# EAGLE board Gamepad_PCB (EAGLE 9.7.0)
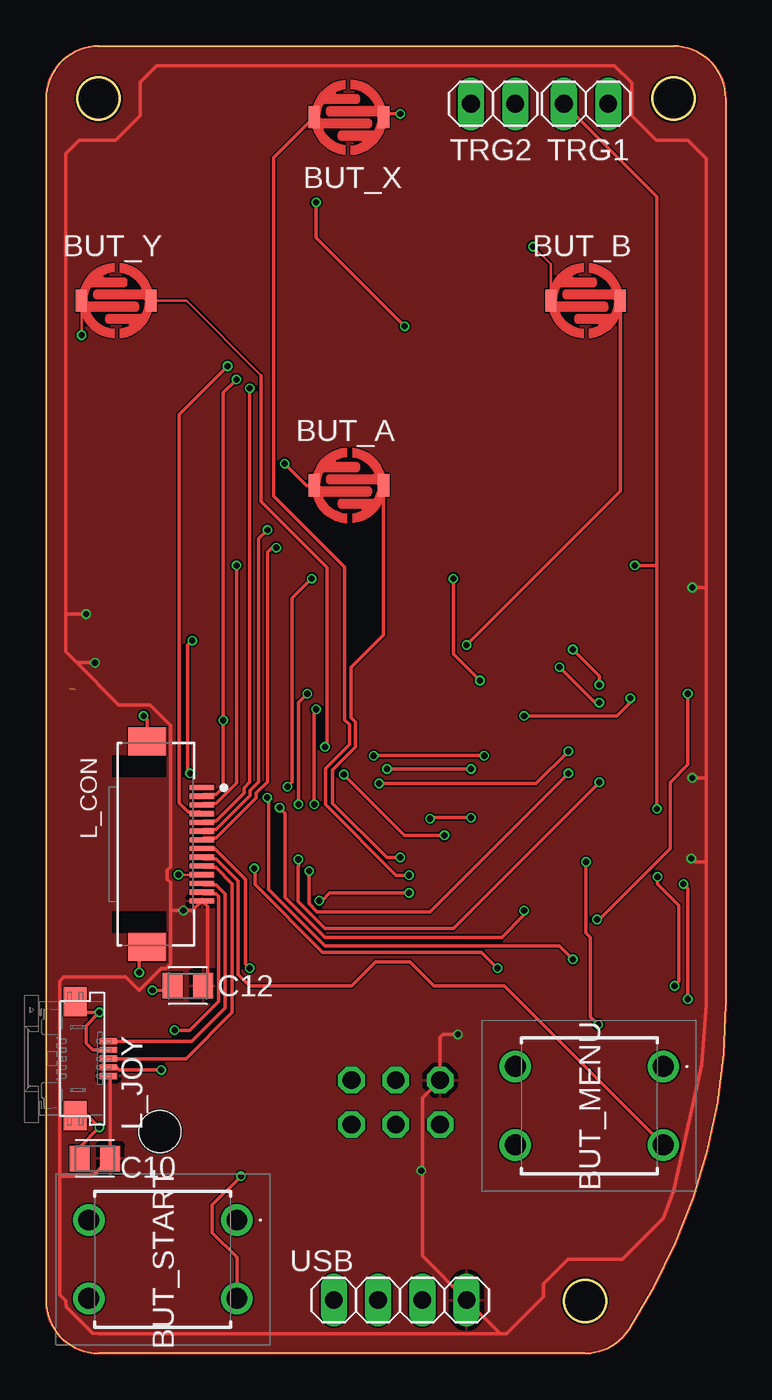
[diagram p0: board, top side]
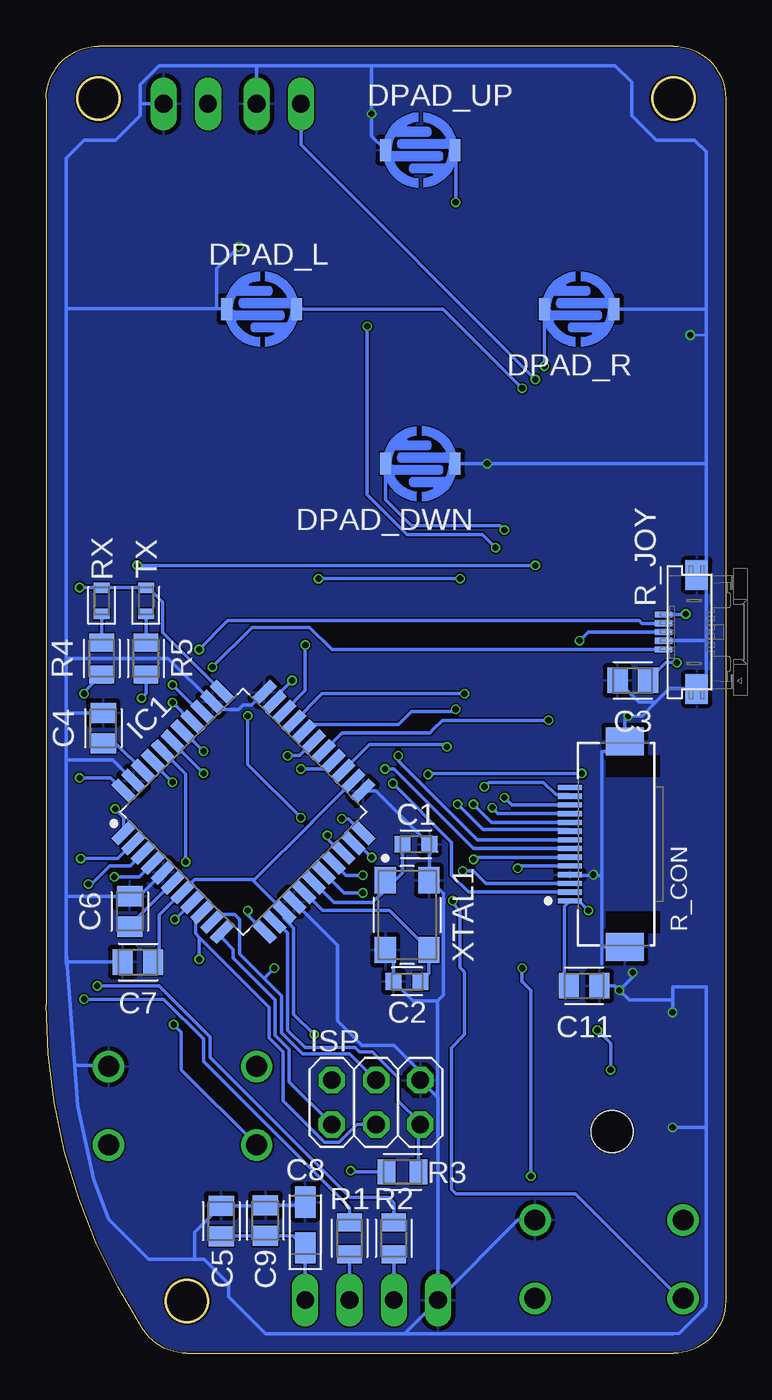
[diagram p1: board, bottom side, seen from below]

Size 39 x 75 mm. Coordinates in mm from the lower left corner, seen from the top.
Outline: 3,75 arc90 0,72 0,3 arc90 3,0 30.92,0 arc57 33.43,1.35 arc33 39,20 39,72 arc90 36,75 3,75
Outline: circle at 3,72 radius 1.2
Outline: circle at 30.92,3 radius 1.2
Outline: circle at 36,72 radius 1.2
Copper layers (1*16): Top / Bottom
Stack-up Default Layer Stack: Top User Defined 0.035mm / Dielectric-1 Core:089 1.5mm / Bottom User Defined 0.035mm
Design rules "jlcpcb-2-layer *": minimum track width 3.5mil, minimum drill 0.2mm, track to track 3.5mil, track to pad 5mil, pad to pad 5mil, via to via 5mil, smd to smd 0mil, copper to edge 0.1mm, drill to drill 5mil, minimum pad ring 4mil, minimum via ring 4mil, stop-mask expansion 3mil, vias tented up to drill 100mil, thermal gap 10mil
Holes 2.4 mm at 6.52,12.72

## Footprints (pad centres in the part's own frame; a part is rotated, then mirrored left to right if it is on the bottom)
MEMBRANEBUTTON = smd 0.635 x 1.27: P$1 2,0; P$2 -2,0
TL9000F120QG = drill 1.2 pad 1.8: 1 0,0; 2 0,8.5; 3 -4.5,0; 4 -4.5,8.5
CAPC1608X85 = smd 0.921 x 0.97: 1 -0.775,0; 2 0.775,0
CAPC2012X110 = smd 1.165 x 1.465: 1 -0.875,0; 2 0.875,0
CAPMP3216X180N = smd 1.796 x 1.189: 1 -1.31,0; 2 1.31,0
QFP80P1200X1200X120-44 = smd 1.5 x 0.55: 1 -5.7,4; 2 -5.7,3.2; 3 -5.7,2.4; 4 -5.7,1.6; 5 -5.7,0.8; 6 -5.7,0; 7 -5.7,-0.8; 8 -5.7,-1.6; 9 -5.7,-2.4; 10 -5.7,-3.2; 11 -5.7,-4; 23 5.7,-4; 24 5.7,-3.2; 25 5.7,-2.4; 26 5.7,-1.6; 27 5.7,-0.8; 28 5.7,0; 29 5.7,0.8; 30 5.7,1.6; 31 5.7,2.4; 32 5.7,3.2; 33 5.7,4 | smd 0.55 x 1.5: 12 -4,-5.7; 13 -3.2,-5.7; 14 -2.4,-5.7; 15 -1.6,-5.7; 16 -0.8,-5.7; 17 0,-5.7; 18 0.8,-5.7; 19 1.6,-5.7; 20 2.4,-5.7; 21 3.2,-5.7; 22 4,-5.7; 34 4,5.7; 35 3.2,5.7; 36 2.4,5.7; 37 1.6,5.7; 38 0.8,5.7; 39 0,5.7; 40 -0.8,5.7; 41 -1.6,5.7; 42 -2.4,5.7; 43 -3.2,5.7; 44 -4,5.7
2X03 = drill 1.016 octagon: 1 -2.54,-1.27; 2 -2.54,1.27; 3 0,-1.27; 4 0,1.27; 5 2.54,-1.27; 6 2.54,1.27
MOLEX_52892-1433_0 = smd 0.3 x 1.4: 1 -3.25,1.575; 2 -2.75,1.575; 3 -2.25,1.575; 4 -1.75,1.575; 5 -1.25,1.575; 6 -0.75,1.575; 7 -0.25,1.575; 8 0.25,1.575; 9 0.75,1.575; 10 1.25,1.575; 11 1.75,1.575; 12 2.25,1.575; 13 2.75,1.575; 14 3.25,1.575 | smd 1.6 x 2.2: MP1 -5.9,-1.575; MP2 5.9,-1.575
0545500571 = smd 1.65 x 1.3: P$1 -2.275,-0.65; P$2 4.275,-0.65 | smd 0.3 x 1: P$3 0,1.25; P$4 0.5,1.25; P$5 1,1.25; P$6 1.5,1.25; P$7 2,1.25
RESC2012X65 = smd 1.031 x 1.42: 1 -0.919,0; 2 0.919,0
LEDC1608X55N_FLAT-G = smd 0.612 x 0.912: A 0.75,0; C -0.75,0
1X02 = drill 1.016 long: 1 -1.27,0; 2 1.27,0
1X04 = drill 1.016 long: 1 -3.81,0; 2 -1.27,0; 3 1.27,0; 4 3.81,0
OSCCC500X320X110 = smd 1.512 x 1.212: 1 -2,-1.25; 2 2,-1.25; 3 2,1.25; 4 -2,1.25

## Placement (x,y rotation side)
BUT_A  MEMBRANEBUTTON  [MEMBRANEBUTTON]  17.37,49.8 0 top
BUT_B  MEMBRANEBUTTON  [MEMBRANEBUTTON]  30.96,60.4 0 top
BUT_MENU  TL9000F120QG  [TL9000F120QG]  35.42,16.45 90 top
BUT_START  TL9000F120QG  [TL9000F120QG]  10.94,7.64 90 top
BUT_X  MEMBRANEBUTTON  [MEMBRANEBUTTON]  17.37,70.92 180 top
BUT_Y  MEMBRANEBUTTON  [MEMBRANEBUTTON]  4.02,60.4 0 top
C1  22pF  [CAPC1608X85]  17.78,29.21 180 bottom
C2  22pF  [CAPC1608X85]  18.29,21.34 0 bottom
C3  0.1uF  [CAPC2012X110]  5.33,38.61 180 bottom
C4  0.1uF  [CAPC2012X110]  35.73,35.86 90 bottom
C5  1uF  [CAPC2012X110]  28.96,7.59 90 bottom
C6  1uF  [CAPC2012X110]  34.2,25.35 90 bottom
C7  1uF  [CAPC2012X110]  33.73,22.45 180 bottom
C8  10uF  [CAPMP3216X180N]  24.13,7.37 90 bottom
C9  0.1uF  [CAPC2012X110]  26.42,7.62 270 bottom
C10  0.1uF  [CAPC2012X110]  2.79,11.18 0 top
C11  0.1uF  [CAPC2012X110]  8.13,21.08 180 bottom
C12  0.1uF  [CAPC2012X110]  8.13,21.08 0 top
DPAD_DWN  MEMBRANEBUTTON  [MEMBRANEBUTTON]  17.53,51.05 180 bottom
DPAD_L  MEMBRANEBUTTON  [MEMBRANEBUTTON]  26.64,59.91 0 bottom
DPAD_R  MEMBRANEBUTTON  [MEMBRANEBUTTON]  8.41,59.91 180 bottom
DPAD_UP  MEMBRANEBUTTON  [MEMBRANEBUTTON]  17.53,69.04 0 bottom
IC1  ATMEGA32U4-AU  [QFP80P1200X1200X120-44]  27.69,31.07 45 bottom
ISP  PINHD-2X3  [2X03]  20.07,14.4 0 bottom
L_CON  MOLEX_52892-1433MOLEX_52892-1433_0_0  [MOLEX_52892-1433_0]  7.37,29.21 270 top
L_JOY  0545500571  [0545500571]  2.32,17.91 270 top
R1  22  [RESC2012X65]  21.59,6.6 90 bottom
R2  22  [RESC2012X65]  19.05,6.6 90 bottom
R3  10K  [RESC2012X65]  18.54,10.41 180 bottom
R4  180  [RESC2012X65]  35.81,39.88 90 bottom
R5  180  [RESC2012X65]  33.27,39.88 90 bottom
R_CON  MOLEX_52892-1433MOLEX_52892-1433_0_0  [MOLEX_52892-1433_0]  7.37,29.21 90 bottom
R_JOY  0545500571  [0545500571]  2.32,40.39 90 bottom
RX  LED_GREEN  [LEDC1608X55N_FLAT-G]  35.81,43.18 90 bottom
TRG1  PINHD-1X2  [1X02]  30.99,71.7 0 top
TRG2  PINHD-1X2  [1X02]  25.65,71.7 0 top
TX  LED_GREEN  [LEDC1608X55N_FLAT-G]  33.27,43.18 90 bottom
USB  PINHD-1X4  [1X04]  20.32,3.05 180 top
XTAL1  [OSCCC500X320X110]  18.29,25.15 270 bottom

## Library data of the parts
BUT_A BUT_B BUT_X BUT_Y DPAD_DWN DPAD_L DPAD_R DPAD_UP = Membrane Button
BUT_MENU BUT_START = SoftButton; DESCRIPTION: SWITCH TACTILE SPST-NO 0.05A 12V; HEIGHT: 5mm; MANUFACTURER_NAME: E-Switch; MANUFACTURER_PART_NUMBER: TL9000F120QG; MOUSER_PART_NUMBER: 612-TL9000F; MOUSER_PRICE-STOCK: https://www.mouser.com/Search/Refine.aspx?Keyword=612-TL9000F
C1-C12 = Capacitor; CATEGORY: Capacitor
IC1 = IC_Embedded; CATEGORY: IC_Embedded; CORE: AVR; DESCRIPTION: IC MCU 8BIT 32KB FLASH 44TQFP; MANUFACTURER: Microchip Technology; MPN: ATmega32U4-AU; OPERATING_TEMP: -40°C to 85°C; PART_STATUS: Active; ROHS_COMPLIANT: COMPLIANT; SERIES: AVR® ATmega; SPEED: 16 MHz; SUB-CATEGORY: Microcontroller; TYPE: 8 bit Microcontroller
ISP TRG1 TRG2 USB = Connector; CATEGORY: CONNECTOR; SUB-CATEGORY: PIN-HEADER
L_CON R_CON = Molex - 52892-1433; CIIVA_IDS: 12958043; CIRCUITS_LOADED: 14; COMPONENT_LINK_1_DESCRIPTION: Manufacturer URL; COMPONENT_LINK_1_URL: http://www.molex.com/molex/index.jsp; COMPONENT_LINK_3_DESCRIPTION: Package Specification; COMPONENT_LINK_3_URL: http://www.molex.com/pdm_docs/sd/528921433_sd.pdf; CONTACT_POSITION: Bottom; CURRENT_MAX_PER_CONTACT: 0.5A; DATASHEET: http://www.molex.com/webdocs/datasheets/pdf/en-us/0528921433_FFC_FPC_CONNECTORS.pdf; DURABILITY_MATING_CYCLES_MAX: 20; ENTRY_ANGLE: 90degrees Angle; FOOTPRINT_VARIANT_NAME_0: Manufacturer Recommended; IMPORTED: yes; IMPORTED_FROM: vault; IMPORT_TS: 1521848386; MATED_HEIGHT: 2.00mm; MATERIAL___METAL: Phosphor Bronze; MATERIAL___PLATING_MATING: Silver, Tin-Bismuth; MATERIAL___PLATING_TERMINATION: Silver, Tin-Bismuth; MF: Molex; MOUNTING_TECHNOLOGY: Surface Mount; MPN: 52892-1433; NUMBER_OF_ROWS: 1; ORIENTATION: Right Angle; PACKAGE: 52892-1433; PACKAGE_DESCRIPTION: 14-Lead FPC Connector, Pitch 0.5 mm; PACKAGE_VERSION: Rev. A, 05/2013; PACKING: Tape and Reel; PCB_LOCATOR: No; PCB_RETENTION: Yes; PITCH___MATING_INTERFACE: 0.50mm; PITCH___TERMINATION_INTERFACE: 0.50mm; POLARIZED_TO_PCB: No; PREFIX: J; RELEASE_DATE: 1411387067; ROHS: Yes; STACKABLE: No; VAULT_GUID: 26F04467-A452-40C9-9F2E-281BCB1B200A; VAULT_REVISION: 27BAFA05-6FC6-475C-9B64-846F2B1A52BC; VOLTAGE_MAX: 50V
L_JOY R_JOY = Molex FFC
R1-R5 = Resistor; CATEGORY: Resistor; SUB-CATEGORY: Fixed
RX TX = LED; CATEGORY: LED; COLOR: GREEN; DESCRIPTION: CHIP LED FLAT; SUB-CATEGORY: CHIP; TYPE: FLAT_TOP
XTAL1 = Crystal-SS

## Nets
+5V: C3.1 C5.1 C7.1 C8.1 C9.2 C10.2 C11.2 C12.2 IC1.2 IC1.7 IC1.14 IC1.24 IC1.34 IC1.44 ISP.2 L_CON.14 L_JOY.P$7 R3.2 R_CON.1 R_JOY.P$7 RX.A TX.A USB.1
B_A: BUT_A.P$1 IC1.21
B_B: BUT_B.P$1 IC1.31
B_MENU: BUT_MENU.4 IC1.40
B_SEL: IC1.26 R_CON.7
B_STRT: BUT_START.4 IC1.18
B_TRBO: IC1.41 R_CON.6
B_X: BUT_X.P$1 IC1.19
B_Y: BUT_Y.P$1 IC1.25
D+: IC1.4 R2.2
D-: IC1.3 R1.2
DP_D: IC1.29 R_CON.9
DP_L: IC1.30 R_CON.10
DP_R: IC1.12 R_CON.11
DP_U: IC1.28 R_CON.8
GND: BUT_A.P$2 BUT_B.P$2 BUT_MENU.1 BUT_START.1 BUT_X.P$2 BUT_Y.P$2 C1.1 C2.1 C3.2 C4.2 C5.2 C6.2 C7.2 C8.2 C9.1 C10.1 C11.1 C12.1 DPAD_DWN.P$2 DPAD_L.P$2 DPAD_R.P$2 DPAD_UP.P$2 IC1.5 IC1.15 IC1.23 IC1.33 IC1.35 IC1.43 ISP.6 L_CON.11 L_CON.MP1 L_CON.MP2 L_JOY.P$1 L_JOY.P$2 L_JOY.P$4 R_CON.4 R_CON.MP1 R_CON.MP2 R_JOY.P$1 R_JOY.P$2 R_JOY.P$4 TRG1.2 TRG2.2 USB.4 XTAL1.2 XTAL1.4
L_B_SEL: BUT_START.3 L_CON.8
L_B_TRBO: BUT_MENU.3 L_CON.9
L_DP_D: DPAD_DWN.P$1 L_CON.6
L_DP_L: DPAD_L.P$1 L_CON.5
L_DP_R: DPAD_R.P$1 L_CON.4
L_DP_U: DPAD_UP.P$1 L_CON.7
L_LX: L_CON.13 L_JOY.P$6
L_LY: L_CON.12 L_JOY.P$3
LT2: IC1.32 R_CON.13
LT3: L_CON.10 L_JOY.P$5
LX: IC1.38 R_CON.2
LY: IC1.39 R_CON.3
MISO: IC1.11 ISP.1
MOSI/D16: IC1.10 ISP.4 R_CON.5
N$1: C1.2 IC1.17 XTAL1.1
N$2: C6.1 IC1.6
N$3: R2.1 USB.3
N$4: C2.2 IC1.16 XTAL1.3
N$5: C4.1 IC1.42
N$6: R4.2 RX.C
N$7: R5.2 TX.C
N$8: IC1.8 R4.1
N$9: IC1.22 R5.1
N$10: R1.1 USB.2
RESET: IC1.13 ISP.5 R3.1
RT3: IC1.20 R_JOY.P$5
RX: IC1.36 R_JOY.P$6
RY: IC1.37 R_JOY.P$3
SCK/D15: IC1.9 ISP.3 R_CON.12
T1: IC1.1 L_CON.3 TRG1.1
T2: IC1.27 L_CON.2 TRG2.1

## Tracks (layer width: path | path; a pad name or v marks a point on that pad's centre or on a via)
+5V  (via drill 0.35)
  Top 0.152: 0,72 0,3 arc90 3,0 30.92,0 arc57 33.43,1.35 arc33 39,20 39,72 arc90 36,75 3,75 arc90 0,72
  Top 0.203: 26.06,1.12 USB.1 21.59,5.59 21.59,10.41 | 26.06,1.12 26.42,1.12 28.53,3.23 28.53,3.99 29.93,5.39 33.08,5.39 33.27,5.59 35.42,7.74 36.03,9.34 37.63,16.58 37.88,20 37.88,28.19 | 37.88,28.19 37.88,33.02 | 37.88,33.02 37.88,43.94 | 37.88,43.94 37.88,68.54 36.82,69.61 35.01,69.61 33.61,71.01 33.61,72.9 32.62,73.88 6.35,73.88 5.39,72.93 5.39,71.01 3.99,69.61 1.89,69.61 1.12,68.83 1.12,42.42 | 1.12,42.42 1.12,40.26 1.75,39.62 | C12.2 9.26,21.34 9.26,25.64 L_CON.14 8.38,25.4 v7.87,25.4 7.14,25.4 | v2.79,39.62 1.75,39.62 | v37.08,43.94 37.88,43.94 | 21.59,10.41 21.59,14.65 ISP.2 22.61,18.12 22.78,18.29 v23.62,18.29 | v37.08,33.02 37.88,33.02 | 7.14,25.4 7.14,27.01 6.95,27.2 6.95,27.72 7.14,27.91 7.14,36.02 5.95,37.21 4.17,37.21 1.75,39.62 | v21.53,10.48 21.59,10.41 | v37.02,28.39 37.22,28.19 37.88,28.19 | 26.06,1.12 3,1.12 2.67,1.15 2.66,1.15 1.15,2.66 1.15,2.67 1.12,3 0.76,3.36 0.76,10.16 | 7.14,25.4 7.14,22.35 6.89,22.1 6.6,22.1 5.33,20.83 4.57,21.59 1.02,21.59 0.76,21.34 0.76,10.16 | v2.29,42.42 1.12,42.42 | 0.76,10.16 2.65,10.16 C10.2 3.67,15.8 L_JOY.P$7
  Bottom 0.203: USB.1 C8.1 24.82,6.75 C9.2 28.93,6.75 C5.1 | C7.1 32.51,22.79 32.51,25.15 31.19,26.47 IC1.7 31.15,26.51 30.48,27.18 27.19,27.18 | C12.2 9.26,21.34 9.26,25.64 L_CON.14 8.43,25.96 v7.87,25.4 | v2.79,39.62 3.44,39.62 C3.1 | v37.08,43.94 v37.07,43.93 RX.A TX.A 33.15,43.93 32.31,43.09 32.31,41.35 IC1.34 | 27.19,27.18 IC1.14 25.35,24.96 24.79,24.39 24.79,19.46 v23.62,18.29 | IC1.44 35.3,33.02 v37.08,33.02 | v21.53,10.48 21.46,10.41 R3.2 | IC1.2 34.89,28.39 v37.02,28.39 | IC1.24 23.75,30.48 23.75,30.47 27.05,27.18 27.19,27.18 | R_JOY.P$7 2.32,42.39 v2.29,42.42
  pour Top: 0,72 0,3 arc90 3,0 30.92,0 arc57 33.43,1.35 arc33 39,20 39,72 arc90 36,75 3,75 arc90
B_A  (via drill 0.35)
  Top 0.203: BUT_A.P$1 19.37,41.22 17.5,39.34 17.5,36.48 17.75,36.22 17.75,34.78 16.45,33.48 16.45,31.56 19.56,28.45 v20.32,28.45
  Bottom 0.203: v20.32,28.45 21.17,29.3 IC1.21
B_B  (via drill 0.35)
  Top 0.203: v24.13,40.64 32.96,49.47 BUT_B.P$1
  Bottom 0.203: IC1.31 24.13,38.02 v24.13,40.64
B_MENU  (via drill 0.35)
  Top 0.203: v30.99,28.19 30.99,24.13 31.24,23.88 31.24,19.3 v31.69,18.86
  Bottom 0.203: BUT_MENU.4 31.24,16.27 31.24,18.41 v31.69,18.86 | v30.99,28.19 30.99,33.24 IC1.40
B_SEL  (via drill 0.35)
  Top 0.203: v19.56,33.53 v24.38,33.53
  Bottom 0.203: R_CON.7 14.2,28.96 14.21,28.97 14.49,28.97 19.05,33.53 v19.56,33.53 | v24.38,33.53 22.96,33.53 IC1.26
B_STRT  (via drill 0.35)
  Top 0.203: v20.83,26.42 16.27,26.42 15.82,25.97 v15.66,25.97
  Bottom 0.203: IC1.18 21.9,26.42 v20.83,26.42 | BUT_START.4 2.64,3.14 8.64,9.14 15.49,9.14 15.75,9.4 15.75,17.53 14.99,18.29 14.99,21.84 15.02,21.88 15.02,21.93 15.24,22.14 15.24,25.39 15.66,25.82 v15.66,25.97
B_TRBO  (via drill 0.35)
  Top 0.203: v31.75,32.77 23.37,24.38 16,24.38 14.46,25.92 14.46,27.95 14.47,27.96 v14.47,28.34
  Bottom 0.203: v31.75,32.77 32.85,33.86 IC1.41 | v14.47,28.34 14.35,28.46 R_CON.6
B_X  (via drill 0.35)
  Top 0.203: BUT_X.P$1 13.06,68.6 13.06,49.17 17.12,45.11 17.12,36.35 17.4,36.08 17.4,34.93 16.02,33.55 16.02,31.48 20.07,27.43 v20.83,27.43
  Bottom 0.203: IC1.19 21.79,27.43 v20.83,27.43
B_Y  (via drill 0.35)
  Top 0.152: BUT_Y.P$1 8.05,60.4 12.34,56.11
  Top 0.203: 12.34,56.11 12.34,48.88 16.13,45.09 16.13,34.93 v16,34.8
  Bottom 0.203: v16,34.8 16,34.92 20.44,34.92 IC1.25
D+  (via drill 0.35)
  Top 0.203: v36.07,21.08 36.32,21.34 36.32,25.69 35.09,26.93 v35.09,27.34
  Bottom 0.203: R2.2 19.05,8.64 19.36,8.94 21.55,8.94 29.58,16.97 29.58,18.15 32.51,21.08 v36.07,21.08 | IC1.4 33.68,27.34 v35.09,27.34
D-  (via drill 0.35)
  Top 0.203: v36.83,20.32 36.83,26.67 v36.58,26.92
  Bottom 0.203: R1.2 21.59,8.38 29.97,16.76 29.97,18.04 32.25,20.32 v36.83,20.32 | IC1.3 34.18,27.97 35.35,27.97 36.4,26.92 v36.58,26.92
DP_D  (via drill 0.35)
  Top 0.203: v15.39,31.5 15.37,31.51 15.37,36.71 15.49,36.83 v15.49,36.95
  Bottom 0.203: R_CON.9 9.04,30.06 13.93,30.06 15.37,31.5 v15.39,31.5 | IC1.29 23.81,36.08 18.78,36.08 18.03,36.83 15.49,36.83 v15.49,36.95
DP_L  (via drill 0.35)
  Top 0.203: v14.48,31.5 14.48,37.34 v14.99,37.85
  Bottom 0.203: R_CON.10 13.44,30.46 v14.48,31.5 | v14.99,37.85 23.17,37.85 IC1.30
DP_R  (via drill 0.35)
  Top 0.203: v27.43,25.4 27.43,25.15 26.16,23.88 16.01,23.88 13.72,26.17 13.72,30.99 v13.4,31.31
  Bottom 0.203: R_CON.11 8.97,30.99 13.08,30.99 v13.4,31.31 | v27.43,25.4 27.43,25.16 IC1.12
DP_U  (via drill 0.35)
  Top 0.203: v18.8,34.29 v25.15,34.29
  Bottom 0.203: v25.15,34.29 24.46,34.29 IC1.28 | R_CON.8 14.24,29.46 18.8,34.01 v18.8,34.29
GND  (via drill 0.35)  (1 unrouted)
  Top 0.152: R_CON.4 v7.59,27.46 | BUT_Y.P$2 2.03,60.39 v2.03,58.42 | BUT_B.P$2 28.96,62.48 v27.94,63.5
  Top 0.203: L_JOY.P$2 2.37,13.63 v3.05,12.95 1.92,11.82 C10.1 | L_CON.MP1 5.79,36.37 v5.59,36.58 | BUT_X.P$2 19.57,71.12 v20.32,71.12 | BUT_A.P$2 14.93,49.8 v13.69,51.05 | 6.97,20.8 C11.1 7,20.83 v6.1,20.83 | v5.33,21.84 5.33,22.85 L_CON.MP2 | L_JOY.P$1 2.29,19.56 v3.05,19.56 2.29,18.8 2.29,17.78 2.66,17.41 L_JOY.P$4
  Bottom 0.152: v2.03,58.42 1.12,58.42
  Bottom 0.203: IC1.5 33.66,26.23 C6.2 37.78,26.23 37.85,26.16 | C1.1 16.58,28.79 | USB.4 18.44,1.12 | 18.44,1.12 26.42,1.12 28.53,3.23 28.53,3.99 29.93,5.39 30.48,5.39 | 30.48,5.39 33.12,5.39 35.4,7.68 36.27,9.97 37.21,14.19 37.38,16.51 | 37.85,22.99 37.38,16.51 | 37.85,59.94 37.85,68.58 36.82,69.61 35.01,69.61 33.61,71.01 33.61,71.63 | 37.85,59.94 37.85,39.88 | 37.85,39.88 37.85,36.83 | 37.85,36.83 37.85,34.04 | 37.85,34.04 37.85,26.16 | 37.85,26.16 37.85,22.99 | 37.85,22.99 37.85,22.35 37.75,22.45 C7.2 | 33.61,71.63 33.61,72.79 32.51,73.88 26.92,73.88 | 20.32,73.88 6.35,73.88 5.39,72.93 5.39,71.01 3.99,69.61 1.79,69.61 1.12,68.94 1.12,59.94 | 20.32,73.88 26.92,73.88 | 1.12,40.89 1.12,45.47 | 1.12,45.47 1.12,51.05 | 1.12,51.05 1.12,58.42 1.12,59.94 | 1.33,38.14 1.12,38.35 1.12,40.89 | 4,37.38 4.8,36.58 v5.59,36.58 5.79,36.37 L_CON.MP1 5.79,35.42 6.67,34.54 7.11,34.54 7.11,27.43 | 4,37.38 3.24,38.14 1.69,38.14 R_JOY.P$1 | 7.11,22.35 7.11,23.37 | 7.11,23.37 7.11,27.43 | 1.12,12.95 1.12,21.03 3.05,21.03 3.05,20.32 | v3.05,12.95 1.12,12.95 | C3.2 4.98,37.38 4,37.38 | R_JOY.P$2 1.67,44.92 1.12,45.47 | TRG1.2 33.54,71.7 33.61,71.63 | BUT_START.1 11.91,7.64 USB.4 | 30.48,5.39 30.48,6.94 C5.2 26.45,8.47 C9.1 24.31,8.49 C8.2 | BUT_MENU.1 35.48,16.51 37.38,16.51 | C4.2 37.76,36.74 37.85,36.83 | DPAD_L.P$2 28.67,59.94 29.21,59.94 | 29.21,59.94 37.85,59.94 | v27.94,63.5 29.21,62.23 29.21,59.94 | DPAD_UP.P$2 19.53,69.06 20.32,69.85 v20.32,71.12 20.32,73.88 | DPAD_R.P$2 1.15,59.91 1.12,59.94 | DPAD_DWN.P$2 v13.69,51.05 1.13,51.05 1.12,51.05 | 16.55,14.69 ISP.6 17.53,16.13 19.05,17.66 20.88,17.66 22.29,19.06 22.29,23.4 IC1.15
  Bottom 0.203: 16.55,14.69 16.51,14.65 USB.4 | IC1.43 35.18,34.04 37.85,34.04 | 37.85,39.88 32,39.88 29.49,37.36 IC1.35 29.32,37.36 28.91,36.95 27.95,36.95 27.69,37.21 27.2,37.21 IC1.33 | 1.12,12.95 1.12,3 1.15,2.67 1.15,2.66 2.66,1.15 2.67,1.15 3,1.12 18.44,1.12 | C1.1 20.07,32.27 IC1.23 | R_CON.4 8.91,27.43 7.11,27.43 | 7.62,27.43 v7.59,27.46 | C11.1 6.35,21.08 v6.1,20.83 | v6.1,20.83 5.33,21.59 v5.33,21.84 | v6.1,20.83 5.53,20.27 3.05,20.27 v3.05,19.56 | L_CON.MP2 7.05,23.31 7.11,23.37 | 16.55,20.22 16.55,14.69 | C1.1 17,27.18 | 17,27.18 17,27.07 | R_JOY.P$4 1.13,40.89 1.12,40.89 | TRG2.2 26.92,73.88 | 17,27.18 16.76,26.93 | 16.76,26.93 16.2,26.38 16.2,20.57 16.55,20.22 | 16.55,20.22 17.95,20.22 C2.1 19.06,22.67 XTAL1.2 | XTAL1.4 16.82,26.93 16.76,26.93
  pour Bottom: 0,72 0,3 arc90 3,0 30.92,0 arc57 33.43,1.35 arc33 39,20 39,72 arc90 36,75 3,75 arc90
L_B_SEL  (via drill 0.35)
  Top 0.203: L_CON.8 9.66,28.96 11.38,27.24 11.38,27.23 11.43,27.18 11.43,22.35 v11.68,22.1 | BUT_START.3 10.94,5.5 9.54,6.91 9.54,8.52 v11.18,10.16
  Bottom 0.203: v11.68,22.1 11.68,21.34 11.18,20.83 v11.18,10.16
L_B_TRBO
  Top 0.203: BUT_MENU.3 26.3,21.08 22.25,21.08 20.88,22.45 18.9,22.45 17.54,21.08 11.68,21.08 11.02,21.74 11.02,27.09 9.75,28.36 9.04,28.36 L_CON.9
L_DP_D  (via drill 0.35)
  Top 0.203: L_CON.6 9.04,30.06 9.75,30.06 11.7,32.01 11.7,32.3 12.19,32.79 12.19,46.74 v12.7,47.24
  Bottom 0.203: v12.7,47.24 12.95,47.5 18.03,47.5 19.53,49 DPAD_DWN.P$1
L_DP_L  (via drill 0.35)
  Top 0.203: L_CON.5 9.04,30.56 9.75,30.56 11.35,32.16 11.35,32.44 11.68,32.78 v11.68,55.37
  Bottom 0.203: v11.68,55.37 16.22,59.91 DPAD_L.P$1
L_DP_R  (via drill 0.35)
  Top 0.203: L_CON.4 8.85,31.06 8.14,31.06 7.62,31.57 7.62,53.85 v10.41,56.64
  Bottom 0.203: DPAD_R.P$1 v10.41,56.64
L_DP_U  (via drill 0.35)
  Top 0.203: L_CON.7 9.04,29.56 9.75,29.56 12.06,31.86 12.06,32.15 12.7,32.79 12.7,45.97 12.95,46.23 v13.21,46.23 | v20.57,58.93 15.49,64.01 v15.49,66.04
  Bottom 0.203: v13.21,46.23 13.97,46.99 18.29,46.99 20.57,49.28 v20.57,58.93 | v15.49,66.04 15.49,69 DPAD_UP.P$1
L_LX  (via drill 0.35)
  Top 0.203: L_CON.13 9.04,26.36 9.75,26.36 9.89,26.21 9.89,20.2 8.23,18.54 v7.37,18.54 | v6.6,16.26 4.19,16.26 4.04,16.41 L_JOY.P$6
  Bottom 0.203: v7.37,18.54 6.6,17.78 v6.6,16.26
L_LY
  Top 0.203: L_CON.12 9.04,26.86 9.75,26.86 10.26,26.35 10.26,19.81 8.36,17.91 L_JOY.P$3
LT2  (via drill 0.35)
  Top 0.203: v23.37,44.45 23.37,40.13 v24.89,38.61 | v13.85,32.51 14.12,32.79 14.12,43.33 v15.24,44.45
  Bottom 0.203: R_CON.13 9.04,32.06 9.75,32.06 10.46,32.77 13.59,32.77 v13.85,32.51 | v15.24,44.45 v23.37,44.45 | v24.89,38.61 25.92,37.58 IC1.32
LT3
  Top 0.203: L_CON.10 9.04,27.86 9.75,27.86 10.67,26.94 10.67,19.56 8.02,16.91 L_JOY.P$5
LX  (via drill 0.35)
  Top 0.203: v19.11,32.69 28.12,32.69 v29.97,34.54
  Bottom 0.203: v29.97,34.54 31.09,35.66 IC1.38 | R_CON.2 14.78,26.46 15.73,27.41 15.73,29.31 v19.11,32.69 | v19.11,32.69
LY  (via drill 0.35)
  Top 0.203: v29.97,33.27 22.04,25.34 15.56,25.34 15.09,25.8 v15.09,27.67
  Bottom 0.203: R_CON.3 13.75,26.96 14.46,27.67 v15.09,27.67 | v29.97,33.27 31.72,35.02 IC1.39
MISO
  Bottom 0.203: IC1.11 28.89,23.81 28.27,23.18 28.27,22.69 25.86,20.28 25.86,18.25 25.06,17.45 25.06,15.58 ISP.1
MOSI/D16  (via drill 0.35)
  Top 0.203: v25.91,22.1 24.99,23.01 15.87,23.01 11.99,26.89 11.99,27.78 v11.94,27.83
  Bottom 0.203: IC1.10 29.45,24.9 29.16,25.19 28.19,25.19 27.91,24.9 27.91,22.92 26.5,21.51 | 26.5,21.51 25.5,20.51 25.5,18.39 24.3,17.19 21.59,17.19 ISP.4 | v25.91,22.1 26.5,21.51 | v11.94,27.83 11.81,27.96 R_CON.5
N$1
  Bottom 0.203: IC1.17 22.48,25.86 20.27,25.86 19.54,26.59 XTAL1.1 18.98,27.15 18.55,27.57 C1.2
N$2
  Bottom 0.203: IC1.6 34.2,24.55 C6.1
N$3
  Bottom 0.203: R2.1 USB.3
N$4
  Bottom 0.203: IC1.16 23.15,25.4 19.29,25.4 XTAL1.3 17.04,21.81 C2.2
N$5
  Bottom 0.203: C4.1 35,34.99 IC1.42
N$6
  Bottom 0.203: R4.2 RX.C
N$7
  Bottom 0.203: R5.2 TX.C
N$8  (via drill 0.35)
  Top 0.203: v36.83,37.85 36.83,33.78 35.81,32.77 35.81,28.96 31.75,24.89 v31.62,24.89
  Bottom 0.203: R4.1 36.83,37.94 v36.83,37.85 | v31.62,24.89 31.6,24.89 IC1.8
N$9  (via drill 0.35)
  Top 0.203: v27.43,36.58 32.77,36.58 33.53,37.34 v33.53,37.59 | v22.04,30.67 22.1,30.73 v24.38,30.73
  Bottom 0.203: v33.53,37.59 33.27,37.85 R5.1 | v22.04,30.67 21.63,30.67 IC1.22 | v24.38,30.73 27.43,33.78 v27.43,36.58
N$10
  Bottom 0.203: USB.2 R1.1
RESET
  Bottom 0.203: R3.1 17.62,13.03 ISP.5 17.53,13.21 18.8,14.48 18.8,15.84 20.26,17.3 21.03,17.3 21.28,17.55 24.15,17.55 25.15,18.54 25.15,24.13 25.79,24.77 IC1.13
RT3  (via drill 0.35)
  Top 0.203: v8.38,40.89 8.13,40.64 8.13,33.4 v8.25,33.27 | v22.86,29.72 20.57,29.72 v17.08,33.21
  Bottom 0.203: R_JOY.P$5 7.89,41.39 v8.38,40.89 | IC1.20 22.08,28.73 22.88,29.53 22.88,29.7 v22.86,29.72 | v8.25,33.27 17.02,33.27 v17.08,33.21
RX  (via drill 0.35)
  Top 0.203: v30.23,40.39 31.75,38.86 v31.75,38.35
  Bottom 0.203: v31.75,38.35 30.19,36.8 IC1.36 | v30.23,40.39 28.58,42.03 4.95,42.03 4.8,41.89 R_JOY.P$6
RY  (via drill 0.35)
  Top 0.203: v29.46,39.37 31.5,37.34 v31.75,37.34
  Bottom 0.203: R_JOY.P$3 22.61,40.39 23.88,41.66 27.18,41.66 v29.46,39.37 | v31.75,37.34 30.64,36.23 IC1.37
SCK/D15  (via drill 0.35)
  Top 0.203: v30.23,22.61 29.46,23.37 16.01,23.37 12.76,26.62 12.76,31.81 v12.69,31.89
  Bottom 0.203: ISP.3 21.17,13.13 22.18,12.11 23.03,12.11 25.41,14.5 25.41,17.3 26.21,18.1 26.21,19.86 30.23,23.87 | IC1.9 30.02,25.21 30.43,24.8 30.43,24.08 30.23,23.87 | v30.23,22.61 30.23,23.87 | v12.69,31.89 12.26,31.46 R_CON.12
T1  (via drill 0.35)
  Top 0.203: v35.05,31.24 35.05,45.21 | 35.05,45.21 35.05,66.36 TRG1.1 | L_CON.3 9.04,31.56 9.75,31.56 10.92,32.73 v10.92,45.21 | v33.78,45.21 35.05,45.21
  Bottom 0.203: IC1.1 34.55,30.73 v35.05,31.24 | v10.92,45.21 v33.78,45.21
T2  (via drill 0.35)
  Top 0.203: L_CON.2 9.04,32.06 9.75,32.06 10.16,32.47 v10.16,36.32 10.16,55.12 v10.92,55.88
  Bottom 0.203: v10.16,36.32 16.26,36.32 16.76,35.81 16.97,35.6 22.02,35.6 IC1.27 | v10.92,55.88 24.38,69.34 TRG2.1

## Text on the board
Document: + | - | +